# EAGLE board KS-SCH-01467 OSSAT OBC Dev Board PCB (EAGLE 9.7.0), part 1 of 2
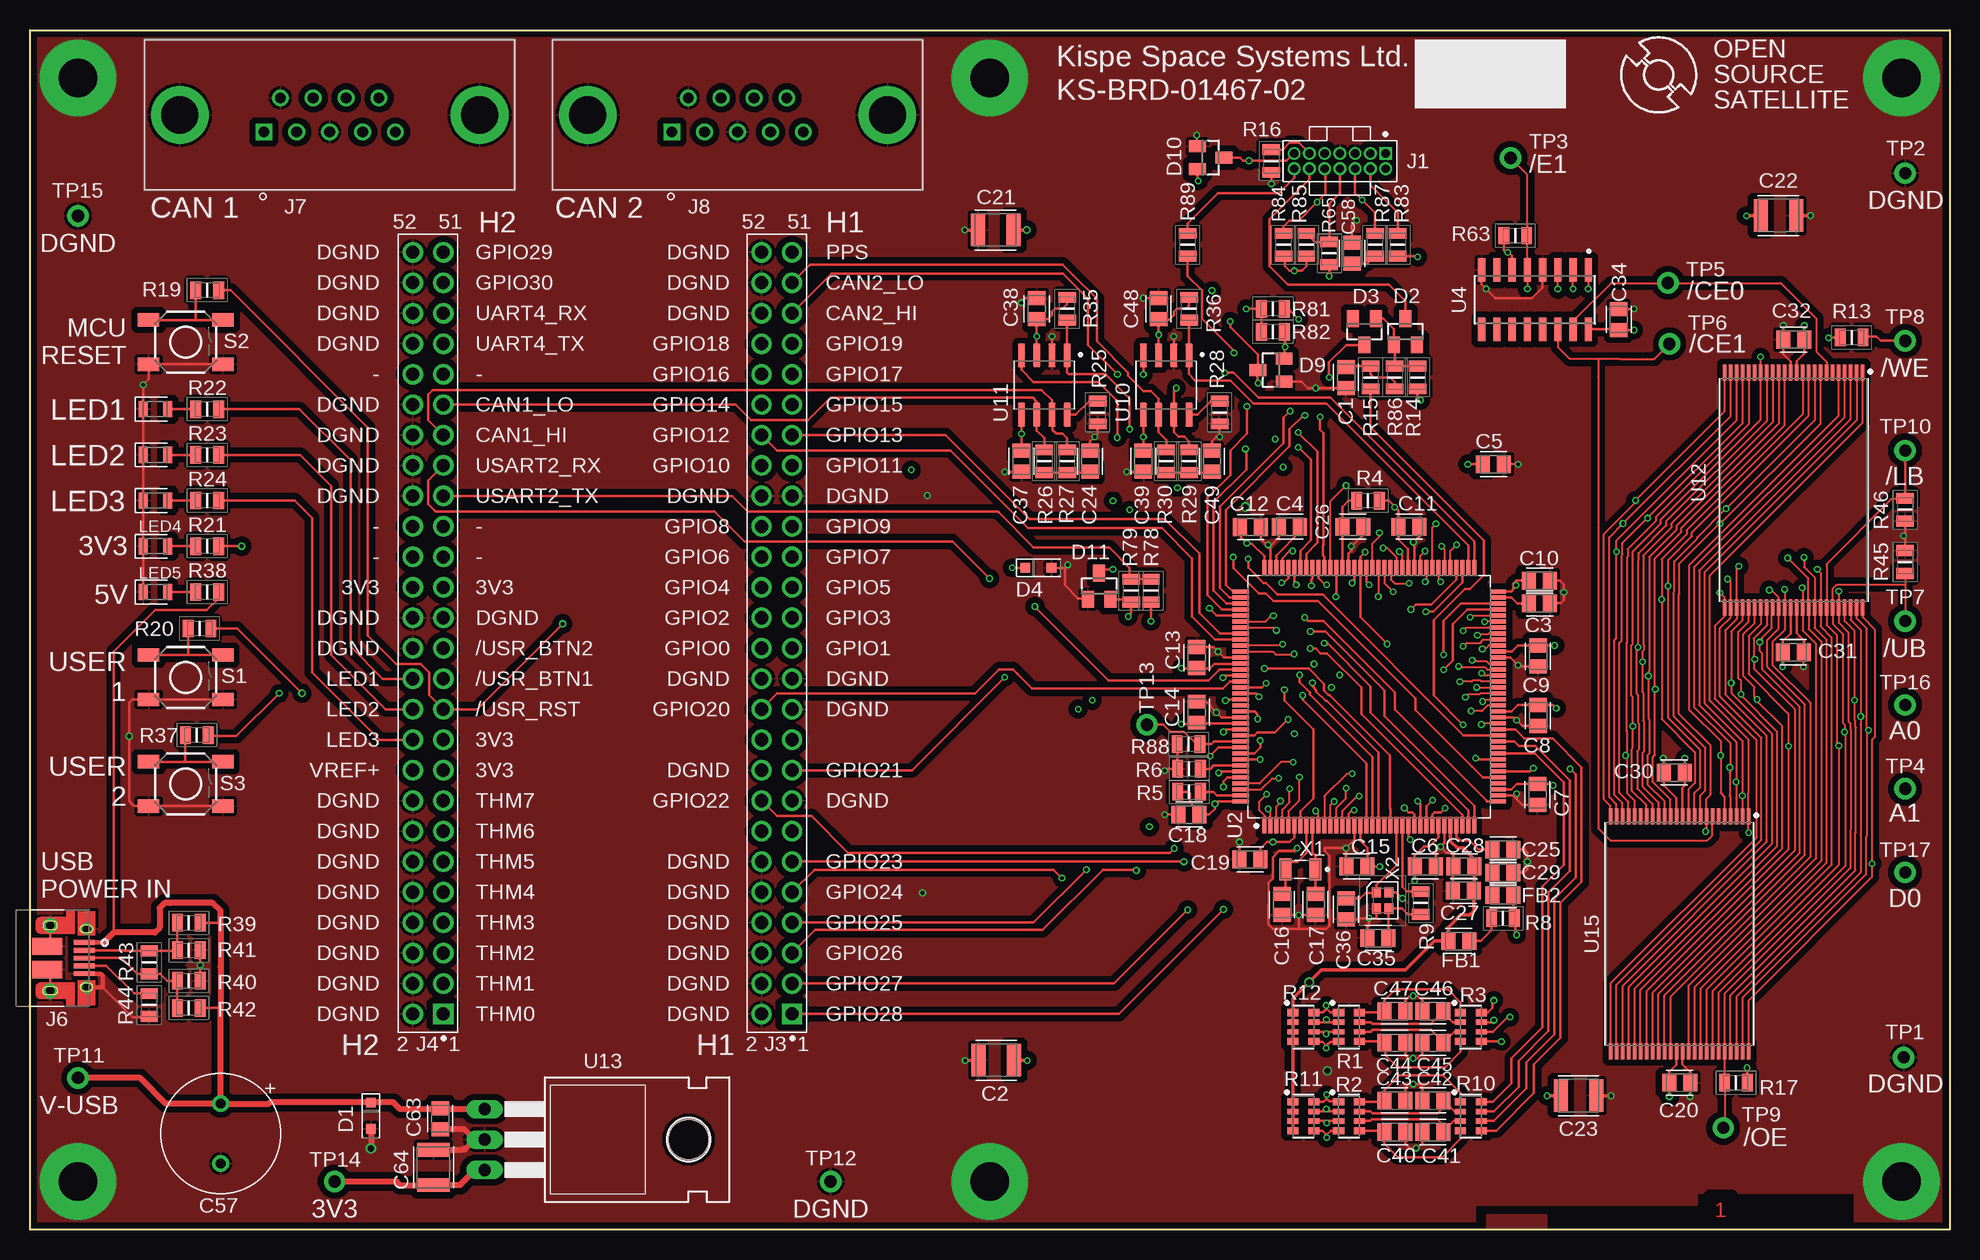
[diagram p0: board, top side]
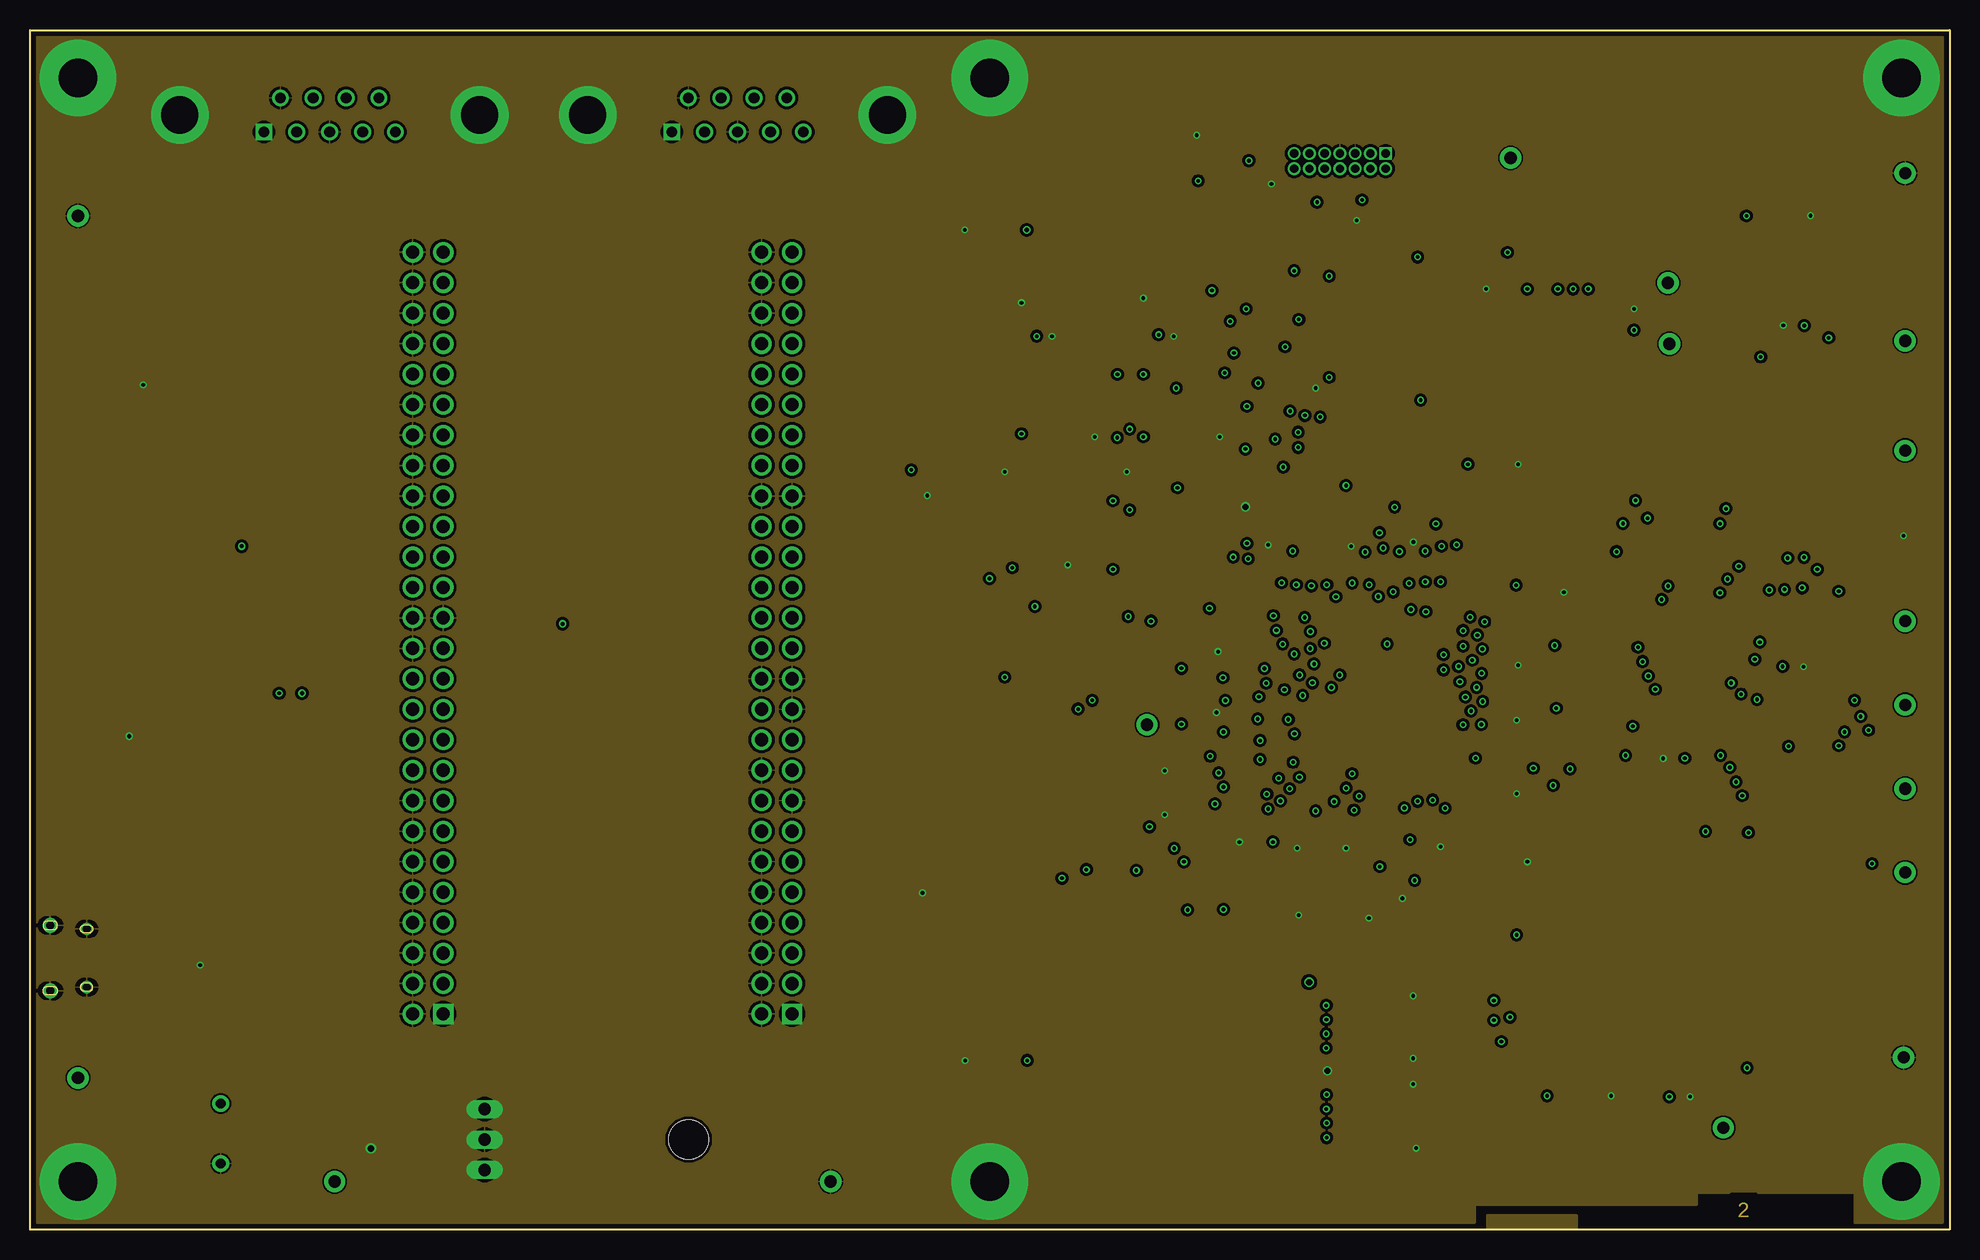
[diagram p1: board, inner layer Route2]
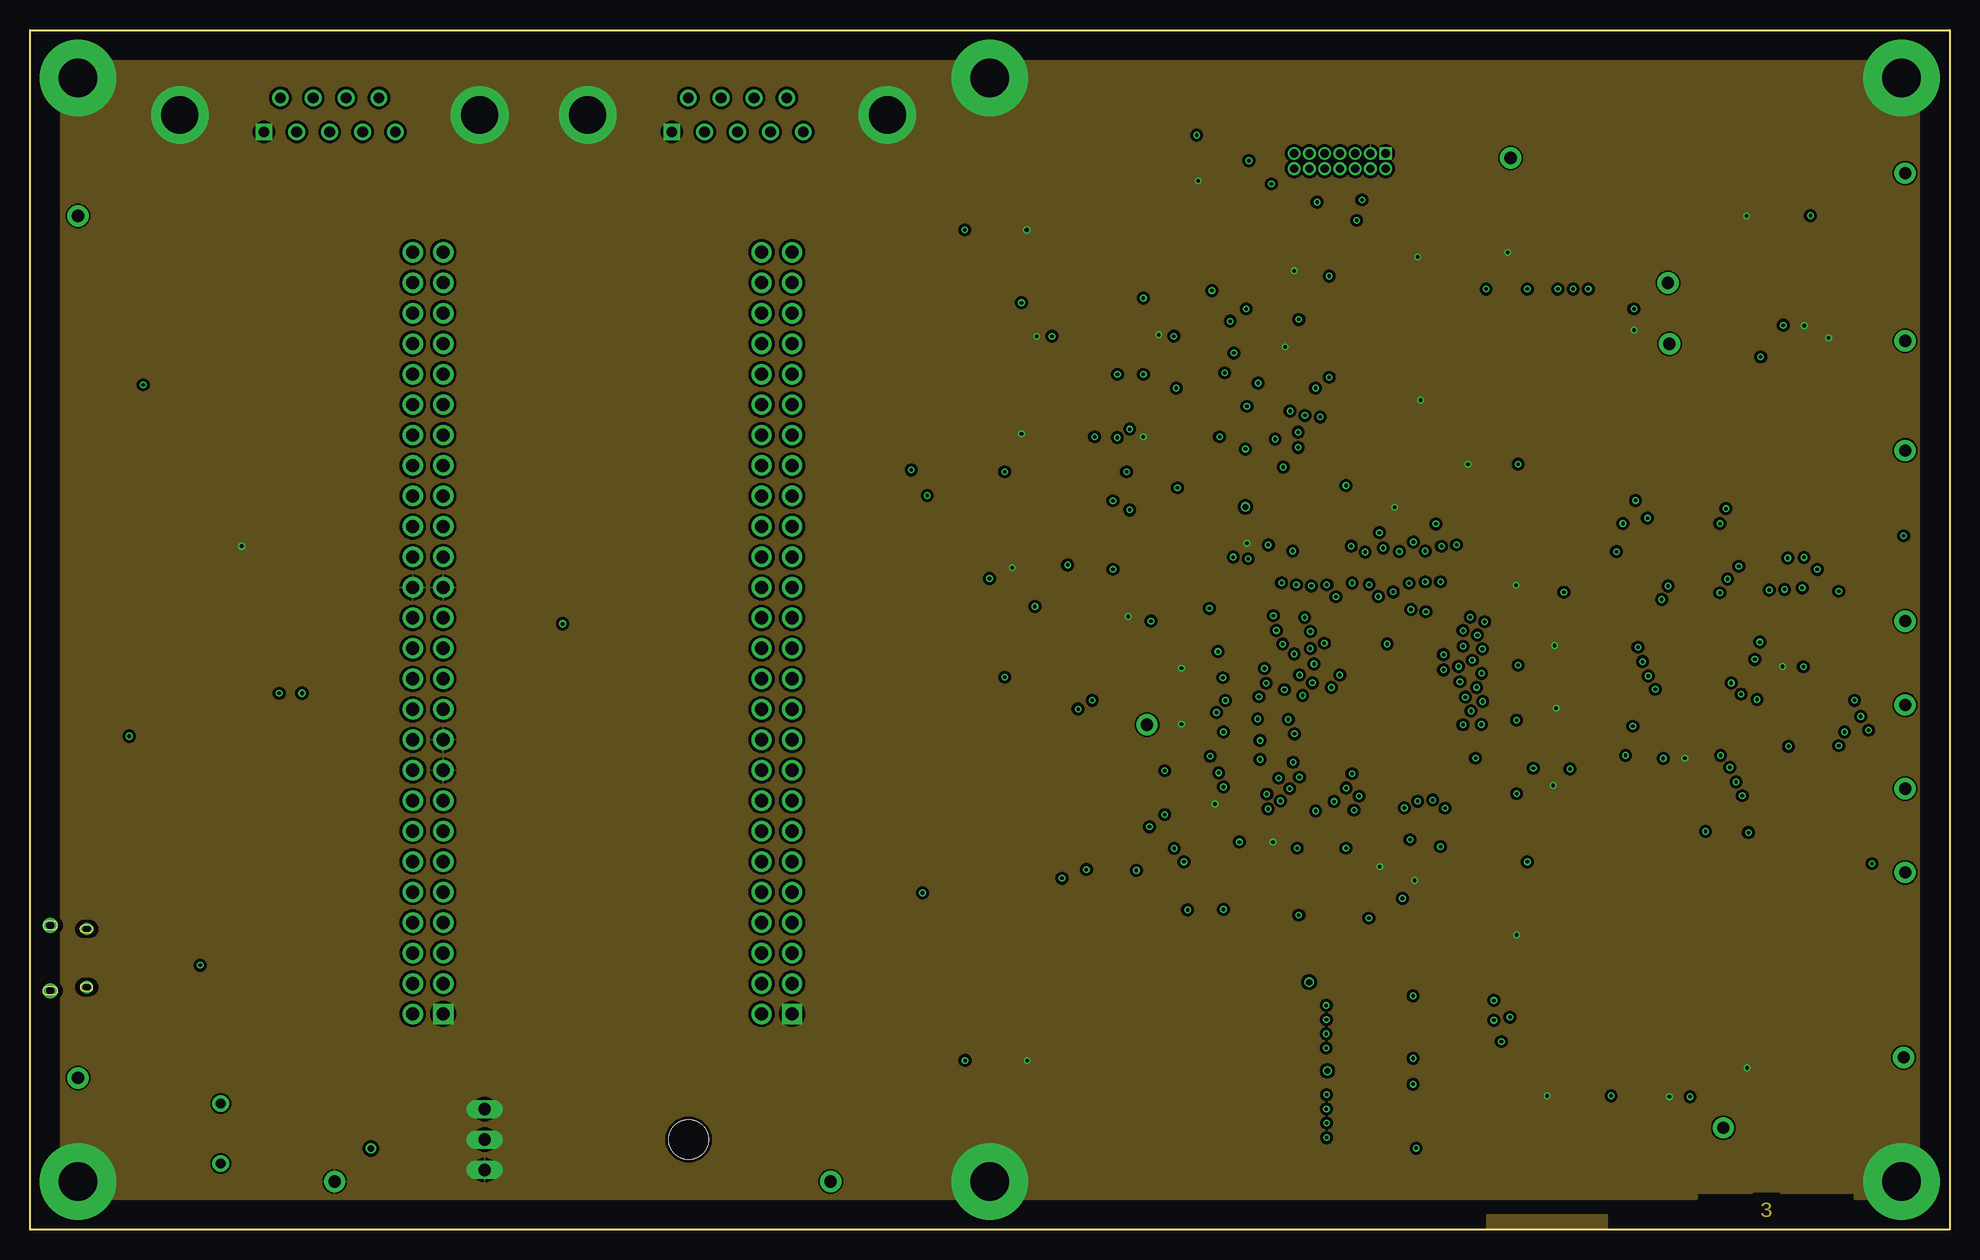
[diagram p2: board, inner layer Route3]
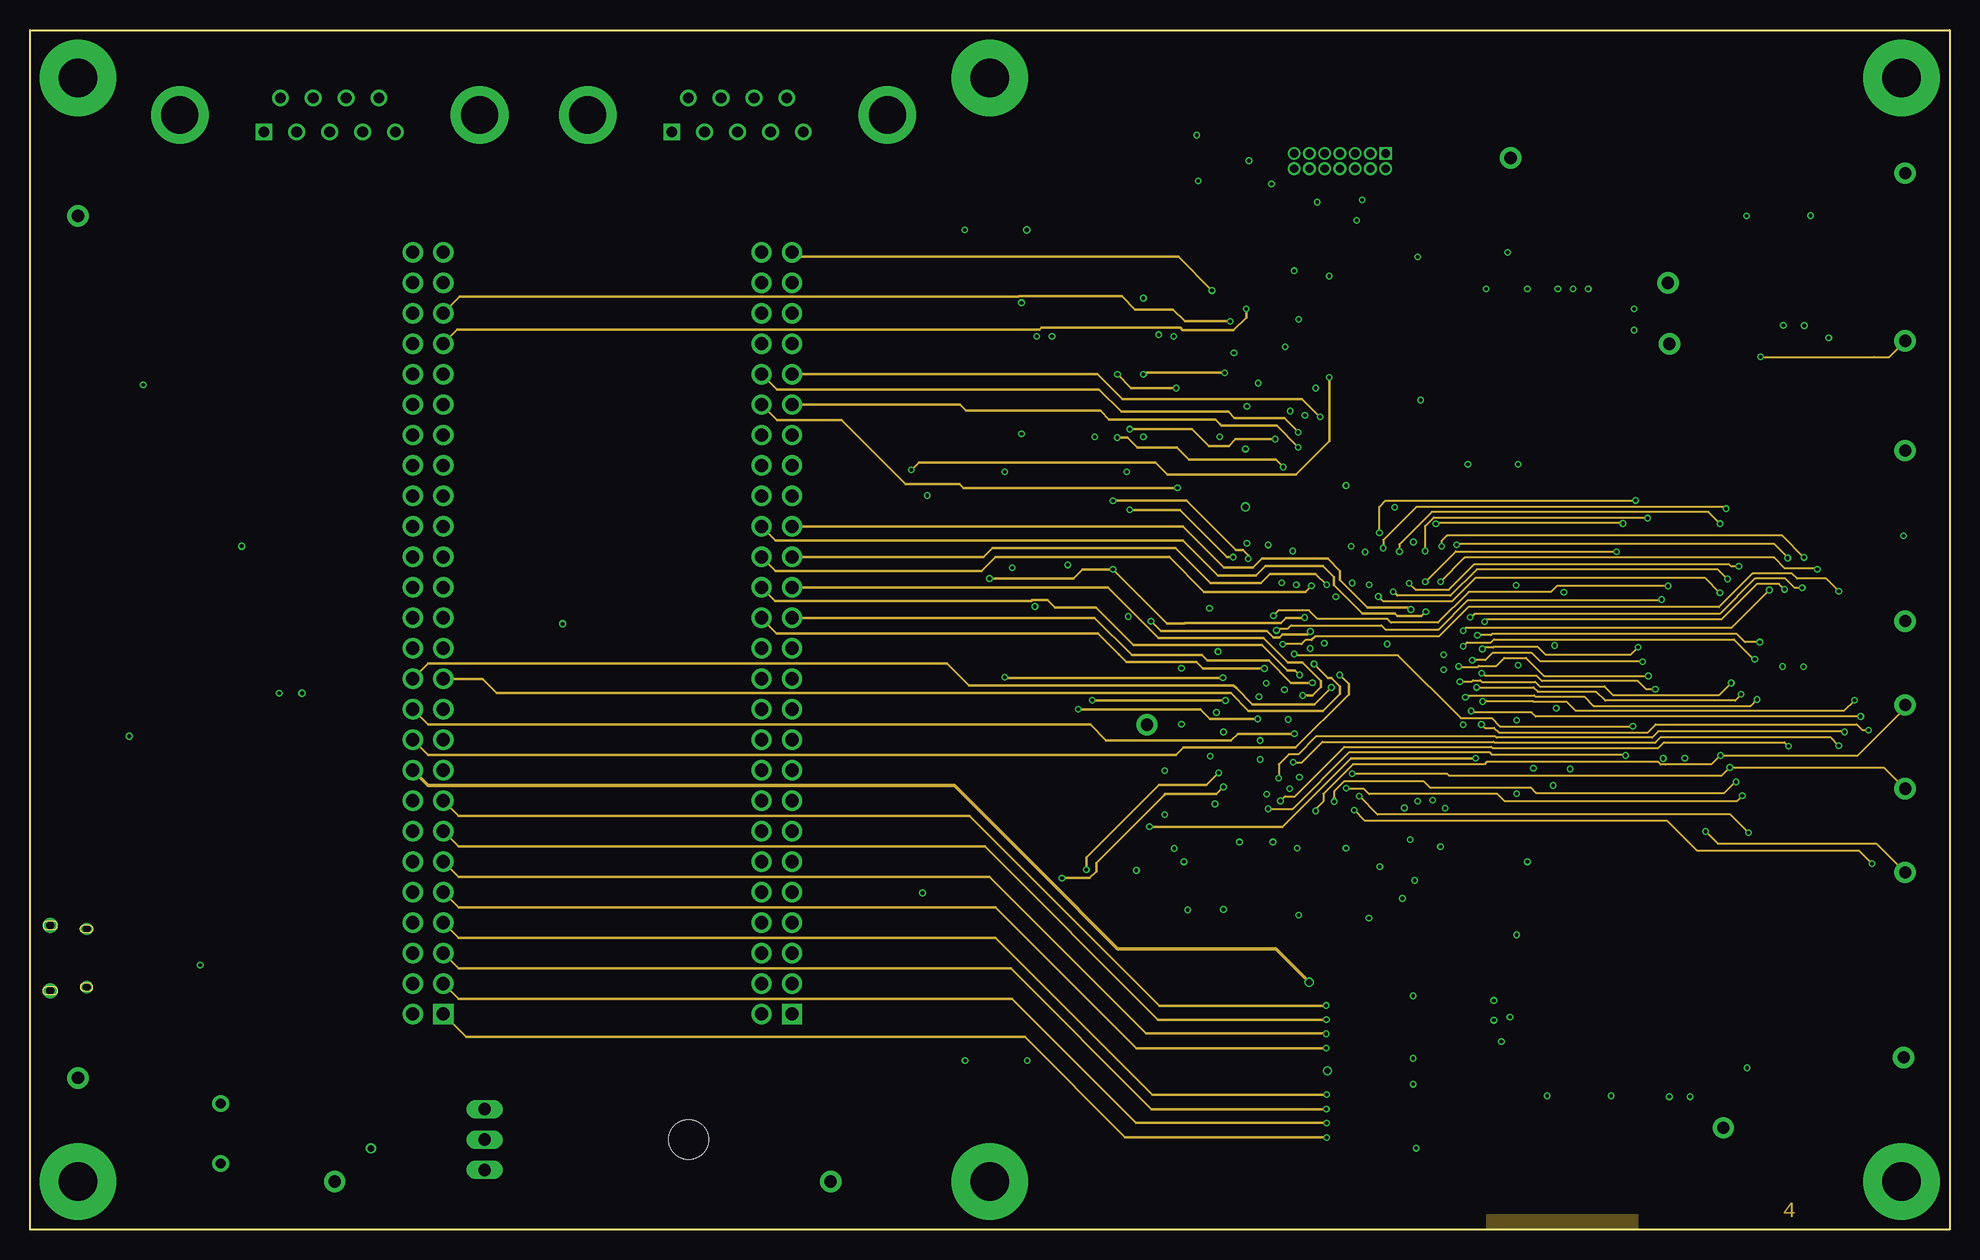
[diagram p3: board, inner layer Route14]
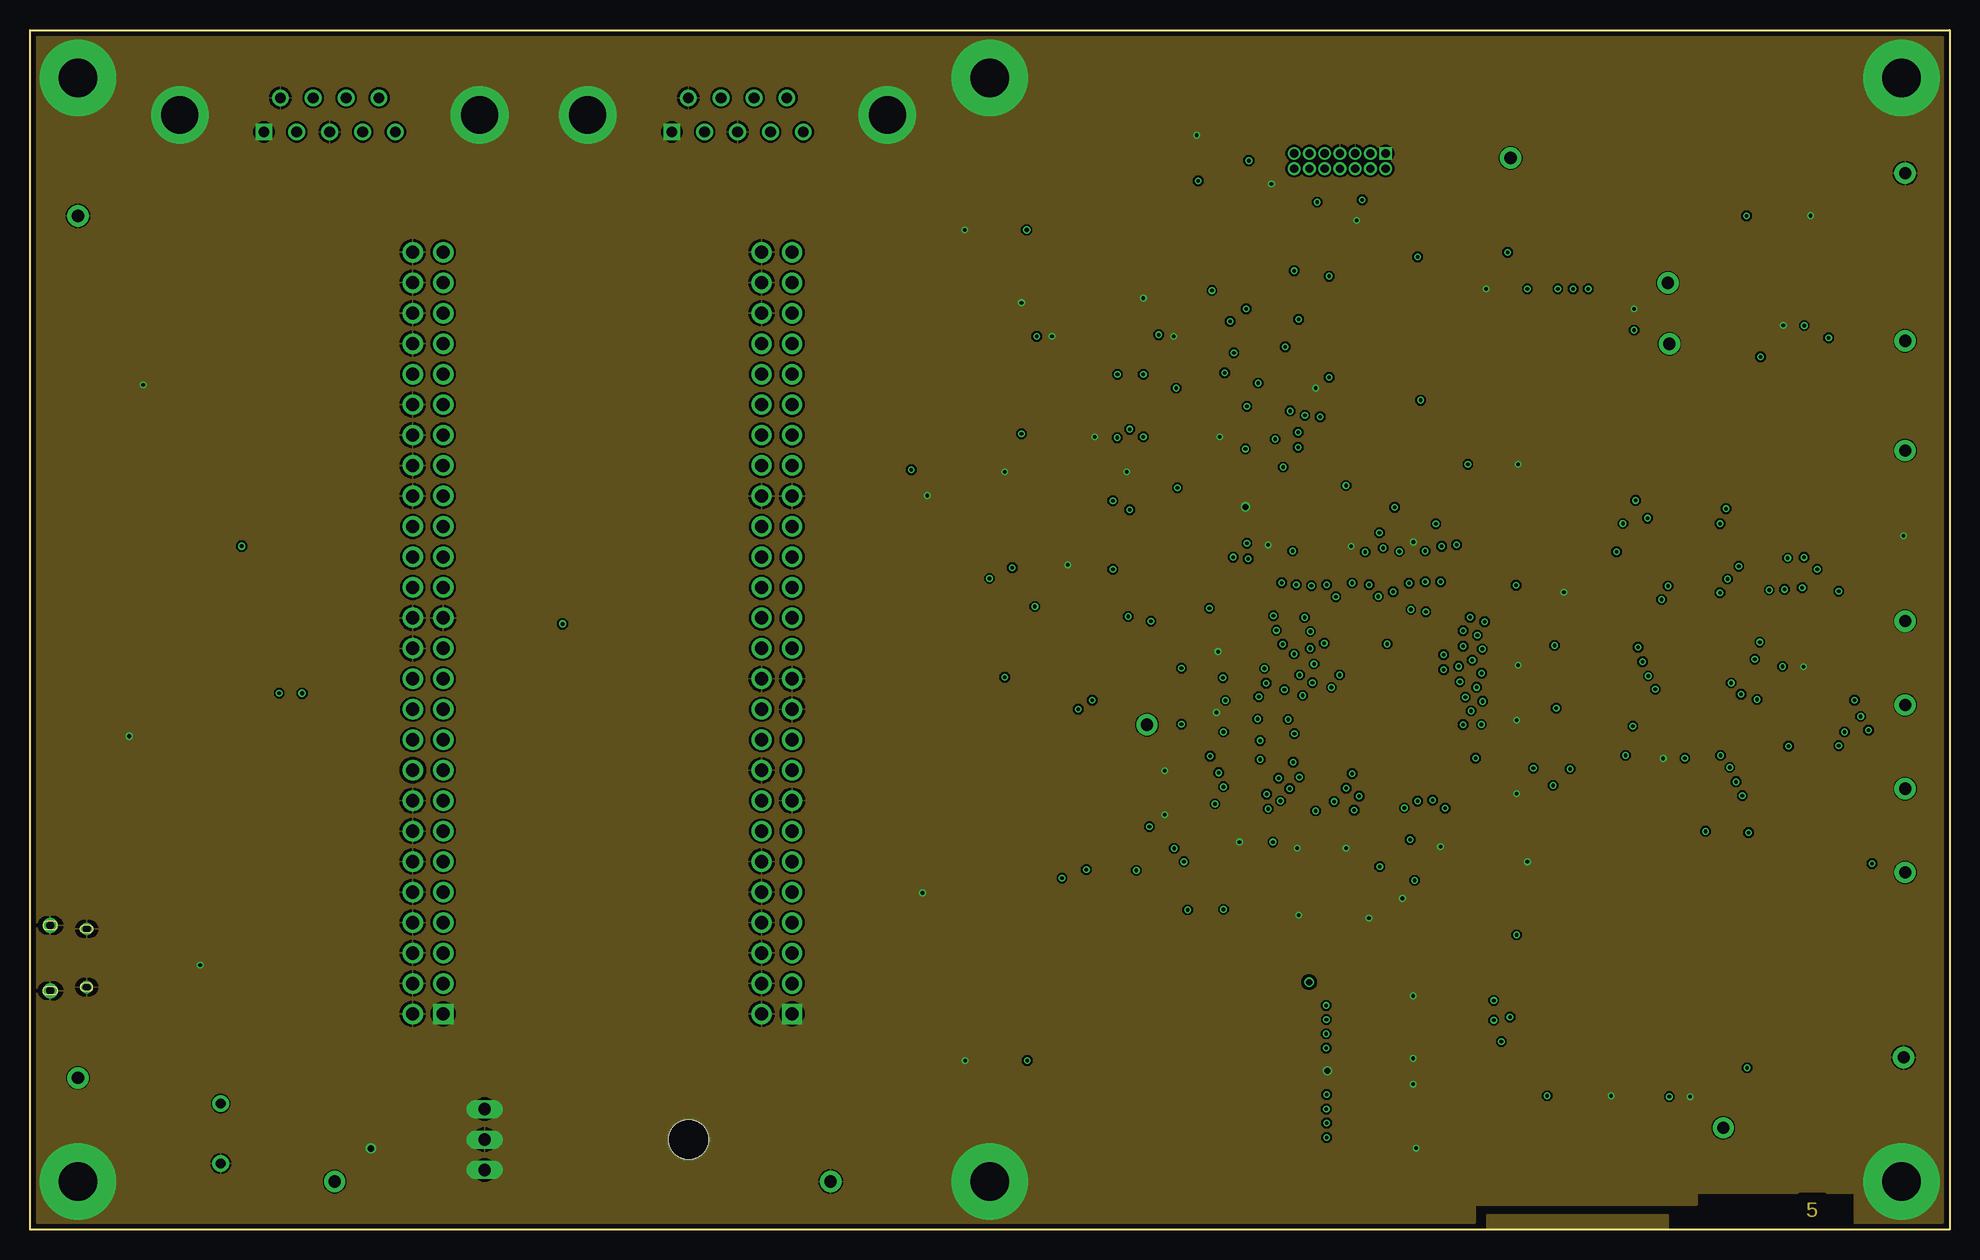
[diagram p4: board, inner layer Route15]
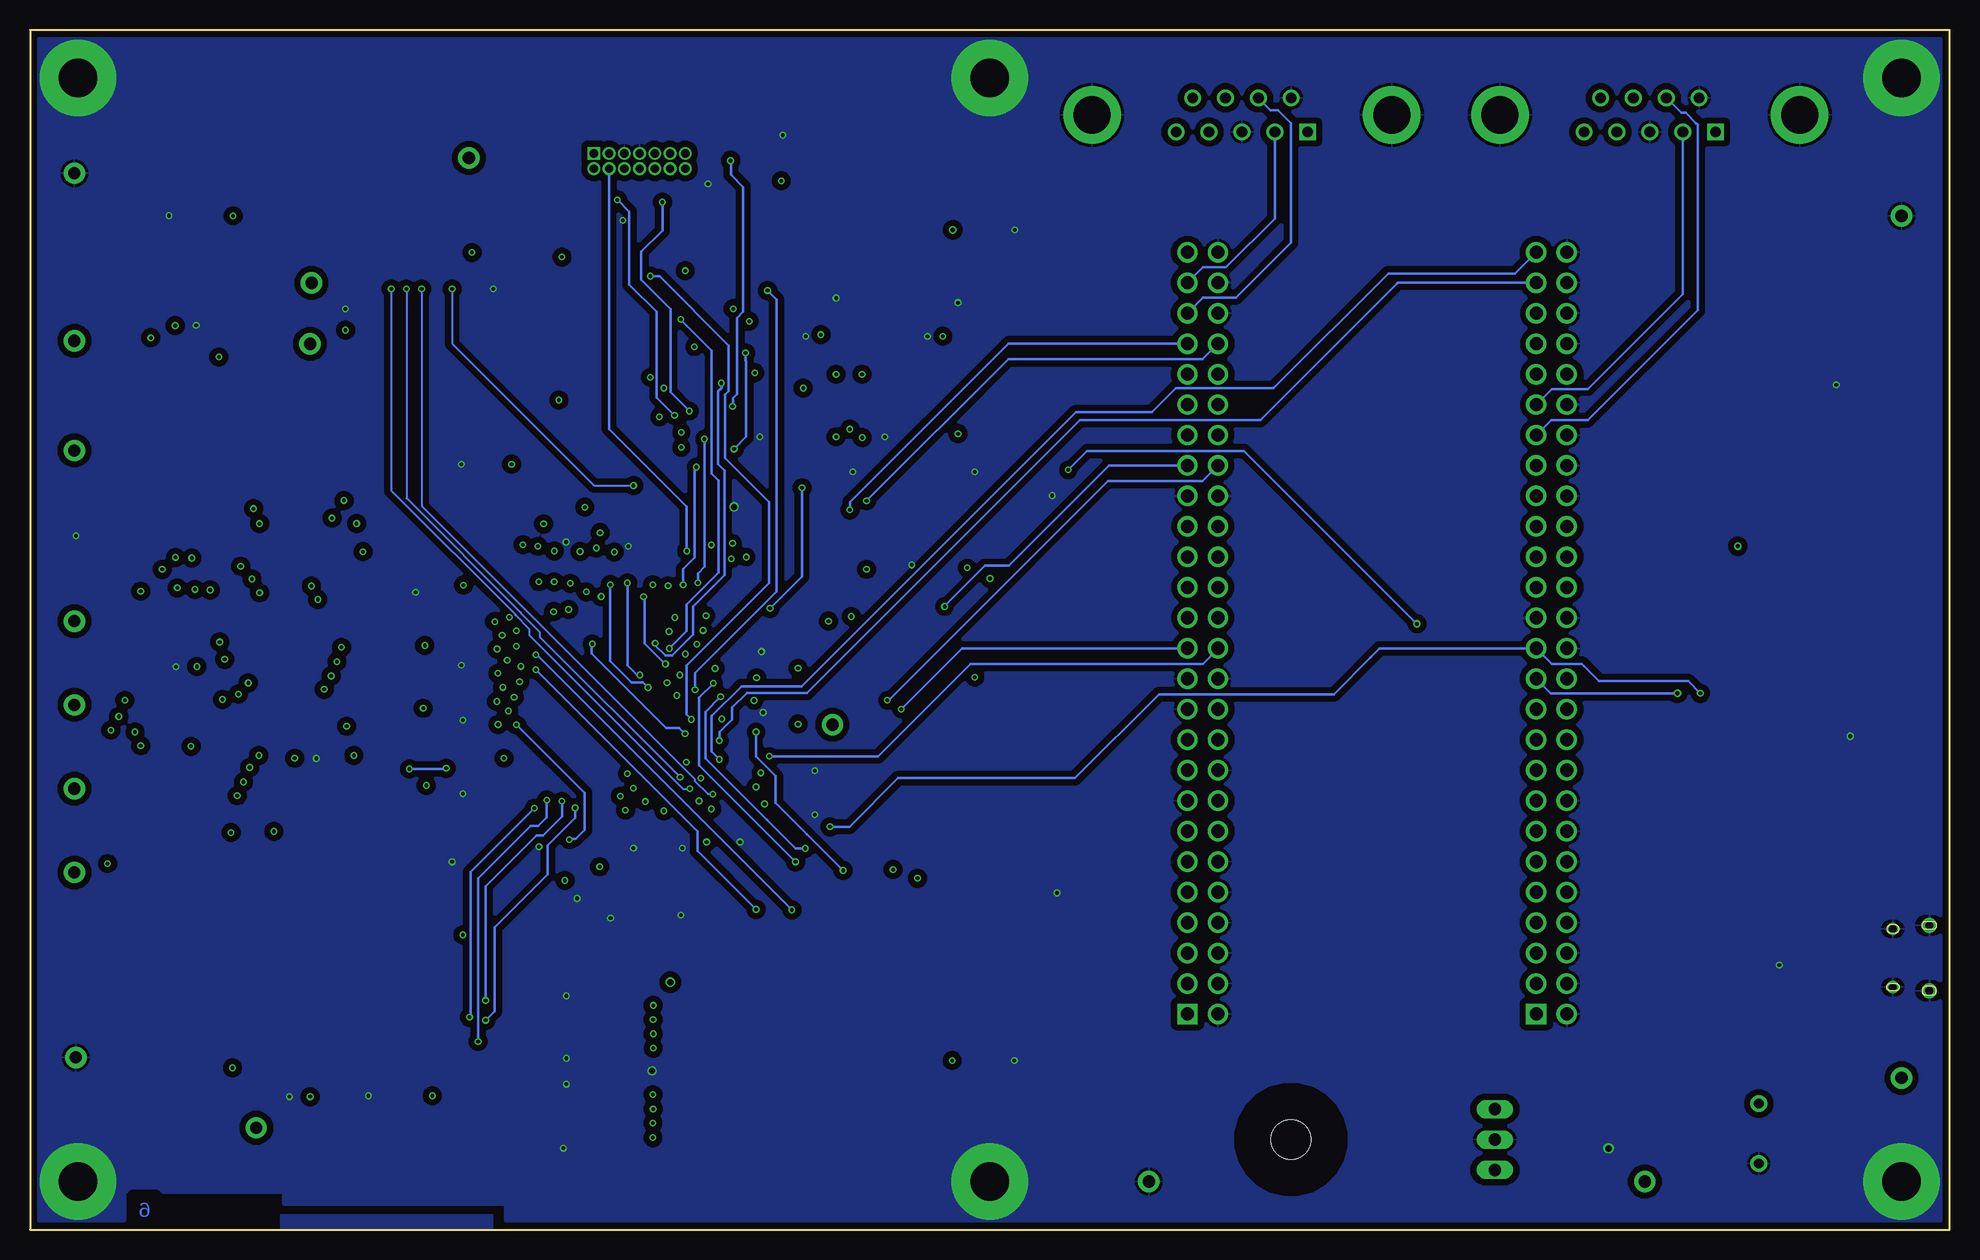
[diagram p5: board, bottom side, seen from below]

Size 160 x 100 mm. Coordinates in mm from the lower left corner, seen from the top.
Outline: 160,0 0,0 0,100 160,100 160,0
Copper layers (1+2*3+14*15+16): Top / Route2 / Route3 / Route14 / Route15 / Bottom
Stack-up 6 Layer Stack: Top SilkScreen Epoxy Ink / Top SolderMask 0.025mm Dk 4.3 / Top Surface Finish User Defined 0.02mm / Top CuFoil:007 0.035mm / Dielectric-1 User Defined 0.11mm / Dielectric-2 User Defined 0.11mm / Route2 CuFoil:007 0.035mm / Dielectric-3 User Defined 0.3mm / Route3 CuFoil:007 0.035mm / Dielectric-4 User Defined 0.11mm / Dielectric-9 User Defined 0.11mm / Dielectric-5 User Defined 0.11mm / Route14 CuFoil:007 0.035mm / Dielectric-6 User Defined 0.3mm / Route15 CuFoil:007 0.035mm / Dielectric-7 User Defined 0.11mm / Dielectric-8 User Defined 0.11mm / Bottom CuFoil:007 0.035mm / Bottom Surface Finish User Defined 0.02mm / Bottom SolderMask 0.025mm Dk 4.3 / Bottom SilkScreen Epoxy Ink
Design rules "default *": minimum track width 6mil, minimum drill 12mil, track to track 11mil, track to pad 8mil, pad to pad 6mil, via to via 6mil, smd to smd 6mil, copper to edge 0mil, drill to drill 36.5mil, minimum pad ring 7mil, minimum via ring 5mil, stop-mask expansion 4mil, vias tented up to drill 30mil, thermal gap 10mil
Net classes: 0 default: width 0.203 mm, drill 0.305 mm; 1 MRAM Bus: width 0.152 mm, drill 0.305 mm; 2 lvds: width 0.381 mm, clearance 0.152 mm to class 0, clearance 0.152 mm to class 1, clearance 0.152 mm; 4 Vref: width 0.305 mm, drill 0.508 mm, clearance 0.279 mm to class 0, clearance 0.279 mm to class 1, clearance 0.279 mm to class 2, clearance 0.279 mm to class 3, clearance 0.279 mm

## Footprints (pad centres in the part's own frame; a part is rotated, then mirrored left to right if it is on the bottom)
CAP_CHIP_0805 = smd 1.165 x 1.465: 1 -0.875,0; 2 0.875,0
CAPC3225X135_1210 = smd 1.165 x 2.715: 1 -1.475,0; 2 1.475,0
CAP_ELECT_RADIAL_D10_H12.5_P5 = drill 0.8 pad 1.4: 1 -2.5,0; 2 2.5,0
SOD323 = smd 0.8 x 0.8: A 1.1,0; C -1.1,0
SOT23 = smd 1 x 1.4: 1 -0.95,-1.1; 2 0.95,-1.1; 3 0,1.1
BEADC2012X105N = smd 1.165 x 1.465: 1 -0.875,0; 2 0.875,0
HOLE-PTH-3.2-6.35 = drill 3.2 pad 6.35: P$1 0,0
HDRV14W41P127_2X7_FTSH = drill 0.686 pad 1.067 square: 1 0,0 | drill 0.686 pad 1.067: 2 0,1.27; 3 1.27,0; 4 1.27,1.27; 5 2.54,0; 6 2.54,1.27; 7 3.81,0; 8 3.81,1.27; 9 5.08,0; 10 5.08,1.27; 11 6.35,0; 12 6.35,1.27; 13 7.62,0; 14 7.62,1.27
HDRVR52W64P254_2X26_6655X495X1105B = drill 1.105 pad 1.705 square: 1 0,0 | drill 1.105 pad 1.705: 2 0,2.54; 3 2.54,0; 4 2.54,2.54; 5 5.08,0; 6 5.08,2.54; 7 7.62,0; 8 7.62,2.54; 9 10.16,0; 10 10.16,2.54; 11 12.7,0; 12 12.7,2.54; 13 15.24,0; 14 15.24,2.54; 15 17.78,0; 16 17.78,2.54; 17 20.32,0; 18 20.32,2.54; 19 22.86,0; 20 22.86,2.54; 21 25.4,0; 22 25.4,2.54; 23 27.94,0; 24 27.94,2.54; 25 30.48,0; 26 30.48,2.54; 27 33.02,0; 28 33.02,2.54; 29 35.56,0; 30 35.56,2.54; 31 38.1,0; 32 38.1,2.54; 33 40.64,0; 34 40.64,2.54; 35 43.18,0; 36 43.18,2.54; 37 45.72,0; 38 45.72,2.54; 39 48.26,0; 40 48.26,2.54; 41 50.8,0; 42 50.8,2.54; 43 53.34,0; 44 53.34,2.54; 45 55.88,0; 46 55.88,2.54; 47 58.42,0; 48 58.42,2.54; 49 60.96,0; 50 60.96,2.54; 51 63.5,0; 52 63.5,2.54
CON_MICRO_USB_FEMALE = smd 0.4 x 1.75: 1 -1.3,2.825; 2 -0.65,2.825; 3 0,2.825; 4 0.65,2.825; 5 1.3,2.825 | drill 0.66 pad 1.016 slot 1.05 rotated 90: 6 -2.425,3.03; 7 2.425,3.03 | drill 0.7 pad 1.27 slot 1.27 rotated 90: 8 2.725,0; 9 -2.725,0 | smd 1.425 x 2.5: 10 -0.963,-0.25; 11 0.963,-0.25
LD09S24A4GV00LF = drill 0.9 pad 1.4 square: 1 0,0 | drill 0.9 pad 1.4: 2 -2.74,0; 3 -5.48,0; 4 -8.22,0; 5 -10.96,0; 6 -1.37,-2.84; 7 -4.11,-2.84; 8 -6.85,-2.84; 9 -9.59,-2.84 | drill 3.1 pad 4.8: MH1 -17.975,-1.42; MH2 7.015,-1.42
LED_CHIP_0805 = smd 0.762 x 1.362: A 1.025,0; C -1.025,0
RESCAXS80P320X160X60-8N = smd 0.931 x 0.592: 1 -0.87,1.2; 4 -0.87,-1.2; 5 0.87,-1.2; 8 0.87,1.2 | smd 0.931 x 0.442: 2 -0.87,0.4; 3 -0.87,-0.4; 6 0.87,-0.4; 7 0.87,0.4
RES_CHIP_0805 = smd 0.9 x 1.45: 1 -0.95,0; 2 0.95,0
TACTILE_SWITCH_SMD_5.2MM = smd 1.8 x 1.1: 1 -3.1,1.85; 2 3.1,1.85; 3 -3.1,-1.85; 4 3.1,-1.85
TP-40TH = drill 1.016 pad 1.778: P$1 0,0
IC_STM32H753ZIT6 = smd 1.35 x 0.348: 1 -10.725,8.75; 2 -10.725,8.25; 3 -10.725,7.75; 4 -10.725,7.25; 5 -10.725,6.75; 6 -10.725,6.25; 7 -10.725,5.75; 8 -10.725,5.25; 9 -10.725,4.75; 10 -10.725,4.25; 11 -10.725,3.75; 12 -10.725,3.25; 13 -10.725,2.75; 14 -10.725,2.25; 15 -10.725,1.75; 16 -10.725,1.25; 17 -10.725,0.75; 18 -10.725,0.25; 19 -10.725,-0.25; 20 -10.725,-0.75; 21 -10.725,-1.25; 22 -10.725,-1.75; 23 -10.725,-2.25; 24 -10.725,-2.75; 25 -10.725,-3.25; 26 -10.725,-3.75; 27 -10.725,-4.25; 28 -10.725,-4.75; 29 -10.725,-5.25; 30 -10.725,-5.75; 31 -10.725,-6.25; 32 -10.725,-6.75; 33 -10.725,-7.25; 34 -10.725,-7.75; 35 -10.725,-8.25; 36 -10.725,-8.75; 73 10.725,-8.75; 74 10.725,-8.25; 75 10.725,-7.75; 76 10.725,-7.25; 77 10.725,-6.75; 78 10.725,-6.25; 79 10.725,-5.75; 80 10.725,-5.25; 81 10.725,-4.75; 82 10.725,-4.25; 83 10.725,-3.75; 84 10.725,-3.25; 85 10.725,-2.75; 86 10.725,-2.25; 87 10.725,-1.75; 88 10.725,-1.25; 89 10.725,-0.75; 90 10.725,-0.25; 91 10.725,0.25; 92 10.725,0.75; 93 10.725,1.25; 94 10.725,1.75; 95 10.725,2.25; 96 10.725,2.75; 97 10.725,3.25; 98 10.725,3.75; 99 10.725,4.25; 100 10.725,4.75; 101 10.725,5.25; 102 10.725,5.75; 103 10.725,6.25; 104 10.725,6.75; 105 10.725,7.25; 106 10.725,7.75; 107 10.725,8.25; 108 10.725,8.75 | smd 0.348 x 1.35: 37 -8.75,-10.725; 38 -8.25,-10.725; 39 -7.75,-10.725; 40 -7.25,-10.725; 41 -6.75,-10.725; 42 -6.25,-10.725; 43 -5.75,-10.725; 44 -5.25,-10.725; 45 -4.75,-10.725; 46 -4.25,-10.725; 47 -3.75,-10.725; 48 -3.25,-10.725; 49 -2.75,-10.725; 50 -2.25,-10.725; 51 -1.75,-10.725; 52 -1.25,-10.725; 53 -0.75,-10.725; 54 -0.25,-10.725; 55 0.25,-10.725; 56 0.75,-10.725; 57 1.25,-10.725; 58 1.75,-10.725; 59 2.25,-10.725; 60 2.75,-10.725; 61 3.25,-10.725; 62 3.75,-10.725; 63 4.25,-10.725; 64 4.75,-10.725; 65 5.25,-10.725; 66 5.75,-10.725; 67 6.25,-10.725; 68 6.75,-10.725; 69 7.25,-10.725; 70 7.75,-10.725; 71 8.25,-10.725; 72 8.75,-10.725; 109 8.75,10.725; 110 8.25,10.725; 111 7.75,10.725; 112 7.25,10.725; 113 6.75,10.725; 114 6.25,10.725; 115 5.75,10.725; 116 5.25,10.725; 117 4.75,10.725; 118 4.25,10.725; 119 3.75,10.725; 120 3.25,10.725; 121 2.75,10.725; 122 2.25,10.725; 123 1.75,10.725; 124 1.25,10.725; 125 0.75,10.725; 126 0.25,10.725; 127 -0.25,10.725; 128 -0.75,10.725; 129 -1.25,10.725; 130 -1.75,10.725; 131 -2.25,10.725; 132 -2.75,10.725; 133 -3.25,10.725; 134 -3.75,10.725; 135 -4.25,10.725; 136 -4.75,10.725; 137 -5.25,10.725; 138 -5.75,10.725; 139 -6.25,10.725; 140 -6.75,10.725; 141 -7.25,10.725; 142 -7.75,10.725; 143 -8.25,10.725; 144 -8.75,10.725
SOIC-16 = smd 1.97 x 0.6: 1 -2.475,4.445; 2 -2.475,3.175; 3 -2.475,1.905; 4 -2.475,0.635; 5 -2.475,-0.635; 6 -2.475,-1.905; 7 -2.475,-3.175; 8 -2.475,-4.445; 9 2.475,-4.445; 10 2.475,-3.175; 11 2.475,-1.905; 12 2.475,-0.635; 13 2.475,0.635; 14 2.475,1.905; 15 2.475,3.175; 16 2.475,4.445
IC_MAX33054EASA+ = smd 1.97 x 0.59: 1 -2.475,1.905; 2 -2.475,0.635; 3 -2.475,-0.635; 4 -2.475,-1.905; 5 2.475,-1.905; 6 2.475,-0.635; 7 2.475,0.635; 8 2.475,1.905
IS61WV204816BLL-10TLI = smd 1.338 x 0.284: 1 -9.79,5.75; 2 -9.79,5.25; 3 -9.79,4.75; 4 -9.79,4.25; 5 -9.79,3.75; 6 -9.79,3.25; 7 -9.79,2.75; 8 -9.79,2.25; 9 -9.79,1.75; 10 -9.79,1.25; 11 -9.79,0.75; 12 -9.79,0.25; 13 -9.79,-0.25; 14 -9.79,-0.75; 15 -9.79,-1.25; 16 -9.79,-1.75; 17 -9.79,-2.25; 18 -9.79,-2.75; 19 -9.79,-3.25; 20 -9.79,-3.75; 21 -9.79,-4.25; 22 -9.79,-4.75; 23 -9.79,-5.25; 24 -9.79,-5.75; 25 9.79,-5.75; 26 9.79,-5.25; 27 9.79,-4.75; 28 9.79,-4.25; 29 9.79,-3.75; 30 9.79,-3.25; 31 9.79,-2.75; 32 9.79,-2.25; 33 9.79,-1.75; 34 9.79,-1.25; 35 9.79,-0.75; 36 9.79,-0.25; 37 9.79,0.25; 38 9.79,0.75; 39 9.79,1.25; 40 9.79,1.75; 41 9.79,2.25; 42 9.79,2.75; 43 9.79,3.25; 44 9.79,3.75; 45 9.79,4.25; 46 9.79,4.75; 47 9.79,5.25; 48 9.79,5.75
TO220L1A = drill 1.016 long: 1 -2.54,0; 2 0,0; 3 2.54,0 | hole 3.302: 0,17
XTAL_NX3215SA = smd 1 x 1.8: 1 -1.25,0; 2 1.25,0
XTAL_NX2016SA = smd 0.85 x 0.75: 1 -0.675,-0.525; 2 0.675,-0.525; 3 0.675,0.525; 4 -0.675,0.525

## Placement (x,y rotation side)
C1  100nF  [CAP_CHIP_0805]  109.7,71.04 270 top
C2  47uF  [CAPC3225X135_1210]  80.54,14.12 180 top
C3  2u2  [CAP_CHIP_0805]  125.83,52.19 0 top
C4  2u2  [CAP_CHIP_0805]  105,58.59 180 top
C5  4u7  [CAP_CHIP_0805]  121.99,63.8 0 top
C6  100nF  [CAP_CHIP_0805]  116.3,30.27 0 top
C7  100nF  [CAP_CHIP_0805]  125.66,36.26 270 top
C8  100nF  [CAP_CHIP_0805]  125.7,42.85 270 top
C9  100nF  [CAP_CHIP_0805]  125.7,47.8 270 top
C10  100nF  [CAP_CHIP_0805]  125.83,54.1 0 top
C11  100nF  [CAP_CHIP_0805]  114.95,58.59 0 top
C12  100nF  [CAP_CHIP_0805]  101.74,58.56 0 top
C13  100nF  [CAP_CHIP_0805]  97.25,47.67 90 top
C14  100nF  [CAP_CHIP_0805]  97.25,43.13 90 top
C15  100nF  [CAP_CHIP_0805]  110.59,30.27 180 top
C16  NF  [CAP_CHIP_0805]  104.36,27.1 270 top
C17  NF  [CAP_CHIP_0805]  107.16,27.1 270 top
C18  100nF  [CAP_CHIP_0805]  96.61,34.59 180 top
C19  100nF  [CAP_CHIP_0805]  101.69,30.85 180 top
C20  100nF  [CAP_CHIP_0805]  137.5,12.24 0 top
C21  47uF  [CAPC3225X135_1210]  80.49,83.32 180 top
C22  47uF  [CAPC3225X135_1210]  145.74,84.53 0 top
C23  47uF  [CAPC3225X135_1210]  129.09,11.16 0 top
C24  47nF  [CAP_CHIP_0805]  88.36,64.06 270 top
C25  100nF  [CAP_CHIP_0805]  122.78,31.67 0 top
C26  100nF  [CAP_CHIP_0805]  110.25,58.59 0 top
C27  1uF  [CAP_CHIP_0805]  119.47,28.24 180 top
C28  100nF  [CAP_CHIP_0805]  119.53,30.27 180 top
C29  1uF  [CAP_CHIP_0805]  122.78,29.77 0 top
C30  1uF  [CAP_CHIP_0805]  137.05,38.1 180 top
C31  100nF  [CAP_CHIP_0805]  146.98,48.13 0 top
C32  1uF  [CAP_CHIP_0805]  147.01,74.19 180 top
C34  100nF  [CAP_CHIP_0805]  132.43,75.87 90 top
C35  10pF  [CAP_CHIP_0805]  112.36,24.3 180 top
C36  10pF  [CAP_CHIP_0805]  109.7,26.72 270 top
C37  100nF  [CAP_CHIP_0805]  82.64,64.06 90 top
C38  100nF  [CAP_CHIP_0805]  83.91,76.75 270 top
C39  100nF  [CAP_CHIP_0805]  92.81,64.06 90 top
C40  1uF  [CAP_CHIP_0805]  113.76,8.12 0 top
C41  1uF  [CAP_CHIP_0805]  116.94,8.12 180 top
C42  1uF  [CAP_CHIP_0805]  116.94,10.77 180 top
C43  1uF  [CAP_CHIP_0805]  113.76,10.77 0 top
C44  1uF  [CAP_CHIP_0805]  113.76,15.57 180 top
C45  1uF  [CAP_CHIP_0805]  116.94,15.57 0 top
C46  1uF  [CAP_CHIP_0805]  116.94,18.21 0 top
C47  1uF  [CAP_CHIP_0805]  113.76,18.21 180 top
C48  100nF  [CAP_CHIP_0805]  94.08,76.75 270 top
C49  47nF  [CAP_CHIP_0805]  98.52,64.06 270 top
C57  470uF  [CAP_ELECT_RADIAL_D10_H12.5_P5]  15.9,8 270 top
C58  100pF  [CAP_CHIP_0805]  110.2,81.38 90 top
C63  100nF  [CAP_CHIP_0805]  34.2,9.25 270 top
C64  10uF  [CAPC3225X135_1210]  33.63,5.18 90 top
D1  5V0  [SOD323]  28.43,9.49 270 top
D2  [SOT23]  114.65,74.85 0 top
D3  [SOT23]  111.22,74.85 180 top
D4  3V3  [SOD323]  84.04,55.16 0 top
D9  [SOT23]  103.44,71.65 90 top
D10  [SOT23]  98.41,89.35 270 top
D11  [SOT23]  89.12,53.64 0 top
FB1  600R  [BEADC2012X105N]  119.09,24.05 0 top
FB2  600R  [BEADC2012X105N]  122.78,27.86 0 top
H1  NF  [HOLE-PTH-3.2-6.35]  80,4 0 top
H2  NF  [HOLE-PTH-3.2-6.35]  156,96 0 top
H3  NF  [HOLE-PTH-3.2-6.35]  156,4 0 top
H4  NF  [HOLE-PTH-3.2-6.35]  80,96 0 top
H5  NF  [HOLE-PTH-3.2-6.35]  4,4 0 top
H6  NF  [HOLE-PTH-3.2-6.35]  4,96 0 top
J1  14M  [HDRV14W41P127_2X7_FTSH]  113,89.71 180 top
J3  52F  [HDRVR52W64P254_2X26_6655X495X1105B]  63.52,17.97 90 top
J4  52F  [HDRVR52W64P254_2X26_6655X495X1105B]  34.44,17.97 90 top
J6  [CON_MICRO_USB_FEMALE]  1.69,22.63 270 top
J7  9F  [LD09S24A4GV00LF]  19.5,91.5 180 top
J8  9F  [LD09S24A4GV00LF]  53.5,91.5 180 top
LED1  [LED_CHIP_0805]  10.45,68.39 0 top
LED2  [LED_CHIP_0805]  10.45,64.58 0 top
LED3  [LED_CHIP_0805]  10.45,60.77 0 top
LED4  [LED_CHIP_0805]  10.45,56.96 0 top
LED5  [LED_CHIP_0805]  10.45,53.15 0 top
R1  10K  [RESCAXS80P320X160X60-8N]  109.95,16.89 0 top
R2  10K  [RESCAXS80P320X160X60-8N]  109.95,9.45 0 top
R3  1K  [RESCAXS80P320X160X60-8N]  120.11,16.89 0 top
R4  0R  [RES_CHIP_0805]  111.54,60.75 0 top
R5  4K7  [RES_CHIP_0805]  96.61,36.5 0 top
R6  4K7  [RES_CHIP_0805]  96.61,38.4 0 top
R8  0R  [RES_CHIP_0805]  122.78,25.95 0 top
R9  0R  [RES_CHIP_0805]  115.92,27.23 270 top
R10  1K  [RESCAXS80P320X160X60-8N]  120.11,9.45 0 top
R11  10K  [RESCAXS80P320X160X60-8N]  106.14,9.45 0 top
R12  10K  [RESCAXS80P320X160X60-8N]  106.14,16.89 0 top
R13  47K  [RES_CHIP_0805]  151.83,74.37 180 top
R14  4K7  [RES_CHIP_0805]  115.66,71.04 90 top
R15  100R  [RES_CHIP_0805]  111.74,71.04 270 top
R16  100R  [RES_CHIP_0805]  103.47,89.07 90 top
R17  47K  [RES_CHIP_0805]  142.21,12.24 0 top
R19  100R  [RES_CHIP_0805]  14.77,78.3 0 top
R20  100R  [RES_CHIP_0805]  14.13,50.1 0 top
R21  910R  [RES_CHIP_0805]  14.77,56.96 180 top
R22  910R  [RES_CHIP_0805]  14.77,68.39 180 top
R23  910R  [RES_CHIP_0805]  14.77,64.58 180 top
R24  910R  [RES_CHIP_0805]  14.77,60.77 180 top
R25  0R  [RES_CHIP_0805]  89,68.12 90 top
R26  60R4  [RES_CHIP_0805]  84.55,64.06 270 top
R27  60R4  [RES_CHIP_0805]  86.45,64.06 270 top
R28  0R  [RES_CHIP_0805]  99.16,68.12 90 top
R29  60R4  [RES_CHIP_0805]  96.61,64.06 270 top
R30  60R4  [RES_CHIP_0805]  94.71,64.06 270 top
R35  47K  [RES_CHIP_0805]  86.45,76.75 90 top
R36  47K  [RES_CHIP_0805]  96.61,76.75 90 top
R37  100R  [RES_CHIP_0805]  13.9,41.21 0 top
R38  2K  [RES_CHIP_0805]  14.77,53.15 180 top
R39  NF  [RES_CHIP_0805]  13.24,25.58 0 top
R40  NF  [RES_CHIP_0805]  13.24,20.75 180 top
R41  NF  [RES_CHIP_0805]  13.24,23.29 180 top
R42  NF  [RES_CHIP_0805]  13.24,18.46 0 top
R43  200R  [RES_CHIP_0805]  9.93,22.27 90 top
R44  NF  [RES_CHIP_0805]  9.93,18.72 90 top
R45  NF  [RES_CHIP_0805]  156.31,55.65 90 top
R46  NF  [RES_CHIP_0805]  156.31,60.02 270 top
R63  47K  [RES_CHIP_0805]  123.79,82.85 180 top
R65  33R  [RES_CHIP_0805]  108.3,81.38 270 top
R78  33R  [RES_CHIP_0805]  93.44,53.26 270 top
R79  47K  [RES_CHIP_0805]  91.79,53.26 270 top
R81  33R  [RES_CHIP_0805]  103.6,76.75 0 top
R82  47K  [RES_CHIP_0805]  103.6,74.85 0 top
R83  10K  [RES_CHIP_0805]  114.01,82.09 270 top
R84  10K  [RES_CHIP_0805]  104.49,82.09 270 top
R85  10K  [RES_CHIP_0805]  106.39,82.09 270 top
R86  1K  [RES_CHIP_0805]  113.76,71.04 90 top
R87  68R  [RES_CHIP_0805]  112.11,82.09 270 top
R88  NF  [RES_CHIP_0805]  96.57,40.46 0 top
R89  33R  [RES_CHIP_0805]  96.49,82.09 270 top
S1  [TACTILE_SWITCH_SMD_5.2MM]  12.99,46.04 0 top
S2  [TACTILE_SWITCH_SMD_5.2MM]  12.99,73.98 0 top
S3  [TACTILE_SWITCH_SMD_5.2MM]  12.99,37.15 0 top
TP1  NF  [TP-40TH]  156.18,14.35 0 top
TP2  NF  [TP-40TH]  156.31,88.06 0 top
TP3  NF  [TP-40TH]  123.41,89.33 0 top
TP4  NF  [TP-40TH]  156.31,36.75 0 top
TP5  NF  [TP-40TH]  136.53,78.91 180 top
TP6  NF  [TP-40TH]  136.66,73.83 0 top
TP7  NF  [TP-40TH]  156.31,50.72 0 top
TP8  NF  [TP-40TH]  156.31,74.09 90 top
TP9  NF  [TP-40TH]  141.14,8.48 90 top
TP10  NF  [TP-40TH]  156.31,64.94 0 top
TP11  NF  [TP-40TH]  4,12.64 0 top
TP12  NF  [TP-40TH]  66.74,4 0 top
TP13  NF  [TP-40TH]  93.11,42.08 0 top
TP14  NF  [TP-40TH]  25.4,4 0 top
TP15  NF  [TP-40TH]  4,84.5 0 top
TP16  NF  [TP-40TH]  156.31,43.73 0 top
TP17  NF  [TP-40TH]  156.31,29.77 0 top
U2  [IC_STM32H753ZIT6]  111.64,44.43 90 top
U4  [SOIC-16]  125.44,77.52 270 top
U10  [IC_MAX33054EASA+]  94.71,70.41 270 top
U11  [IC_MAX33054EASA+]  84.55,70.41 270 top
U12  [IS61WV204816BLL-10TLI]  147.01,61.64 270 top
U13  3V3  [TO220L1A]  37.9,7.5 270 top
U15  [IS61WV204816BLL-10TLI]  137.48,24.63 270 top
X1  [XTAL_NX3215SA]  105.89,30.02 180 top
X2  [XTAL_NX2016SA]  112.74,27.43 270 top

## Library data of the parts
C1-C32 C34-C49 C57 C58 C63 C64 = KSP-CAP
D1 D4 = KSP-TVS; TYPE: CDSOD323
D2 D3 D9-D11 = KSP-DIO; TYPE: BAT54S
FB1 FB2 = KSP-MAG; TYPE: BEAD
H1-H6 = KSP-MIS; TYPE: 3.2D & 6.35
J1 = KSP-CNR; TYPE: 2 ROW MICRO HDR
J3 J4 = KSP-CNR; TYPE: 2 ROW SKT-STRIP
J6 = KSP-CNR; TYPE: MICRO-USB
J7 J8 = KSP-CNR; TYPE: D-SUB
LED1-LED5 = KSP-OPT; TYPE: LED YEL
R1-R3 R10-R12 = KSP-RES; TYPE: 4 PACK ISOL
R4-R6 R8 R9 R13-R17 R19-R30 R35-R46 R63 R65 R78 R79 R81-R89 = KSP-RES
S1-S3 = KSP-SWT; TYPE: 1PST Mom
TP1-TP17 = KSP-CNR; TYPE: TEST POINT PTH
U2 = KSP-ICT; TYPE: STM32H753ZIT6
U4 = KSP-ICT; TYPE: 74LVC138
U10 U11 = KSP-ICT; TYPE: MAX33054
U12 U15 = KSP-ICT; TYPE: IS61WV204816
U13 = KSP-ICT; TYPE: LFnnABV
X1 = KSP-OSC; TYPE: 32.768KHz
X2 = KSP-OSC; TYPE: 25MHz

## Nets
3V3: C2.1 C5.1 C6.1 C7.1 C8.1 C9.1 C10.1 C11.1 C12.1 C13.1 C14.1 C15.1 C18.1 C19.1 C20.1 C21.1 C22.1 C23.1 C30.1 C31.1 C32.1 C34.1 C37.2 C38.2 C39.2 C48.2 C64.1 D4.C D9.2 D10.2 D11.2 FB2.2 J1.3 J4.17 J4.19 J4.29 J4.30 R4.2 R5.1 R8.2 R13.2 R14.1 R17.2 R21.1 R35.2 R36.2 R63.2 R79.2 R82.2 R83.2 R84.2 R85.2 TP14.P$1 U2.6 U2.17 U2.30 U2.39 U2.52 U2.62 U2.72 U2.84 U2.108 U2.121 U2.131 U2.144 U4.6 U4.16 U10.3 U10.5 U11.3 U11.5 U12.12 U12.36 U13.3 U15.12 U15.36
/CE0 [MRAM Bus]: TP5.P$1 U4.15 U12.7
/CE1 [MRAM Bus]: TP6.P$1 U4.14 U15.7
/E1 [MRAM Bus]: R63.1 TP3.P$1 U2.97 U4.5
/LB [MRAM Bus]: R46.1 TP10.P$1 U2.141 U12.42 U15.42
/OE [MRAM Bus]: R17.1 TP9.P$1 U2.118 U12.44 U15.44
/UB [MRAM Bus]: R45.1 TP7.P$1 U2.142 U12.43 U15.43
/USR_BTN1: J4.23 R20.2 U2.96
/USR_BTN2: J4.25 R37.2 U2.44
/USR_RST: D3.3 J4.21 R19.2
/WE [MRAM Bus]: R13.1 TP8.P$1 U2.119 U12.18 U15.18
A0 [MRAM Bus]: TP16.P$1 U2.10 U12.5 U15.5
A1 [MRAM Bus]: TP4.P$1 U2.11 U12.4 U15.4
A2 [MRAM Bus]: U2.12 U12.3 U15.3
A3 [MRAM Bus]: U2.13 U12.2 U15.2
A4 [MRAM Bus]: U2.14 U12.1 U15.1
A5 [MRAM Bus]: U2.15 U12.48 U15.48
A6 [MRAM Bus]: U2.50 U12.47 U15.47
A7 [MRAM Bus]: U2.53 U12.46 U15.46
A8 [MRAM Bus]: U2.54 U12.45 U15.45
A9 [MRAM Bus]: U2.55 U12.30 U15.30
A10 [MRAM Bus]: U2.56 U12.29 U15.29
A11 [MRAM Bus]: U2.57 U12.28 U15.28
A12 [MRAM Bus]: U2.87 U12.27 U15.27
A13 [MRAM Bus]: U2.88 U12.26 U15.26
A14 [MRAM Bus]: U2.89 U12.25 U15.25
A15 [MRAM Bus]: U2.90 U12.24 U15.24
A16 [MRAM Bus]: U2.80 U12.23 U15.23
A17 [MRAM Bus]: U2.81 U12.22 U15.22
A18 [MRAM Bus]: U2.82 U12.21 U15.21
A19 [MRAM Bus]: U2.2 U12.20 U15.20
A20 [MRAM Bus]: U2.3 U12.31 U15.31
A21 [MRAM Bus]: U2.4 U4.1
A22 [MRAM Bus]: U2.5 U4.2
A23 [MRAM Bus]: U2.1 U4.3
AV0: R10.5 U2.49
AV1: R10.6 U2.42
AV2: R10.7 U2.47
AV3: R10.8 U2.45
AV4: R3.5 U2.28
AV5: R3.6 U2.29
AV6: R3.7 U2.26
AV7: R3.8 U2.27
BOOT0: R6.2 U2.138
CAN1_HI: J4.39 J7.7 R27.1 U11.7
CAN1_LO: J4.41 J7.2 R26.1 U11.6
CAN2_HI: J3.47 J8.7 R29.1 U10.7
CAN2_LO: J3.49 J8.2 R30.1 U10.6
D0 [MRAM Bus]: TP17.P$1 U2.85 U12.8 U15.8
D1 [MRAM Bus]: U2.86 U12.9 U15.9
D2 [MRAM Bus]: U2.114 U12.10 U15.10
D3 [MRAM Bus]: U2.115 U12.11 U15.11
D4 [MRAM Bus]: U2.58 U12.14 U15.14
D5 [MRAM Bus]: U2.59 U12.15 U15.15
D6 [MRAM Bus]: U2.60 U12.16 U15.16
D7 [MRAM Bus]: U2.63 U12.17 U15.17
D8 [MRAM Bus]: U2.64 U12.32 U15.32
D9 [MRAM Bus]: U2.65 U12.33 U15.33
D10 [MRAM Bus]: U2.66 U12.34 U15.34
D11 [MRAM Bus]: U2.67 U12.35 U15.35
D12 [MRAM Bus]: U2.68 U12.38 U15.38
D13 [MRAM Bus]: U2.77 U12.39 U15.39
D14 [MRAM Bus]: U2.78 U12.40 U15.40
D15 [MRAM Bus]: U2.79 U12.41 U15.41
DGND: C1.2 C2.2 C3.2 C4.2 C5.2 C6.2 C7.2 C8.2 C9.2 C10.2 C11.2 C12.2 C13.2 C14.2 C15.2 C16.2 C17.2 C18.2 C19.2 C20.2 C21.2 C22.2 C23.2 C24.1 C25.2 C26.2 C27.2 C28.2 C29.2 C30.2 C31.2 C32.2 C34.2 C35.2 C36.2 C37.1 C38.1 C39.1 C40.2 C41.2 C42.2 C43.2 C44.1 C45.1 C46.1 C47.1 C48.1 C49.1 C57.2 C58.2 C63.2 C64.2 D1.A D4.A D9.1 D10.1 D11.1 H1.P$1 H2.P$1 H3.P$1 H4.P$1 H5.P$1 H6.P$1 J1.5 J1.7 J3.2 J3.4 J3.6 J3.8 J3.10 J3.12 J3.15 J3.18 J3.21 J3.23 J3.24 J3.35 J3.36 J3.48 J3.50 J3.52 J4.2 J4.4 J4.6 J4.8 J4.10 J4.12 J4.14 J4.16 J4.26 J4.27 J4.28 J4.36 J4.38 J4.40 J4.42 J4.46 J4.48 J4.50 J4.52 J6.5 J6.6 J6.7 J6.8 J6.9 J6.10 J6.11 J7.3 J7.6 J7.MH1 J7.MH2 J8.3 J8.6 J8.MH1 J8.MH2 LED1.C LED2.C LED3.C LED4.C LED5.C R6.1 R16.1 R25.1 R28.1 R40.1 R41.1 R44.1 R45.2 R46.2 R88.1 S1.3 S1.4 S2.3 S2.4 S3.3 S3.4 TP1.P$1 TP2.P$1 TP12.P$1 TP15.P$1 U2.16 U2.31 U2.38 U2.51 U2.61 U2.83 U2.94 U2.107 U2.120 U2.130 U4.4 U4.8 U10.2 U11.2 U12.13 U12.37 U13.2 U15.13 U15.37 X2.2 X2.4
FDCAN1_RX: U2.103 U11.4
FDCAN1_TX: R35.1 U2.104 U11.1
FDCAN2_RX: U2.73 U10.4
FDCAN2_TX: R36.1 U2.74 U10.1
GPIO0: J3.26 U2.135
GPIO1: J3.25 U2.129
GPIO2: J3.28 U2.22
GPIO3: J3.27 U2.20
GPIO4: J3.30 U2.19
GPIO5: J3.29 U2.18
GPIO6: J3.32 U2.100
GPIO7: J3.31 U2.99
GPIO8: J3.34 U2.75
GPIO9: J3.33 U2.76
GPIO10: J3.38 U2.127
GPIO11: J3.37 U2.122
GPIO12: J3.40 U2.117
GPIO13: J3.39 U2.116
GPIO14: J3.42 U2.113
GPIO15: J3.41 U2.102
GPIO16: J3.44 U2.101
GPIO17: J3.43 U2.98
GPIO18: J3.46 U2.48
GPIO19: J3.45 U2.41
GPIO20: J3.22 U2.124
GPIO21: J3.17 U2.123
GPIO22: J3.16 U2.126
GPIO23: J3.11 U2.125
GPIO24: J3.9 U2.140
GPIO25: J3.7 U2.139
GPIO26: J3.5 U2.132
GPIO27: J3.3 U2.70
GPIO28: J3.1 U2.69
GPIO29: J4.51 U2.137
GPIO30: J4.49 U2.136
JTDO-SWO: R65.2 U2.133
JTRST: R88.2 TP13.P$1 U2.134
L_CSN+1: C40.1 R2.5 R10.4
L_CSN+10: C41.1 R2.6 R10.3
L_CSN+11: C42.1 R2.7 R10.2
L_CSN+12: C43.1 R2.8 R10.1
L_CSN+13: C44.2 R1.5 R3.4
L_CSN+14: C45.2 R1.6 R3.3
L_CSN+15: C46.2 R1.7 R3.2
L_CSN+16: C47.2 R1.8 R3.1
LED1: J4.24 R22.1 U2.91
LED2: J4.22 R23.1 U2.92
LED3: J4.20 R24.1 U2.93
N$2: C26.1 R4.1 U2.95
N$6: FB1.2 R8.1
N$8: C25.1 C29.1 FB2.1 U2.33
N$10: C35.1 R9.2 X2.3
N$11: C4.1 U2.106
N$13: C3.1 U2.71
N$15: C58.1 R87.2
N$18: R15.2 U2.25
N$19: D2.1 D3.1 R14.2 R86.2
N$23: R19.1 S2.1 S2.2
N$24: R5.2 U2.143
N$25: C24.2 R26.2 R27.2
N$26: R25.2 U11.8
N$27: R28.2 U10.8
N$28: C49.2 R29.2 R30.2
N$29: J1.11 R16.2
N$30: R20.1 S1.1 S1.2
N$31: C1.1 R15.1 R86.1
N$32: LED4.A R21.2
N$33: LED1.A R22.2
N$34: LED2.A R23.2
N$35: LED3.A R24.2
N$36: R37.1 S3.1 S3.2
N$37: LED5.A R38.2
N$38: J6.3 R40.2 R42.1 R43.1
N$39: J6.2 R39.1 R41.2 R43.2
N$40: J6.4 R44.2
PPS: J3.51 U2.7
RCC_OSC32_IN: C16.1 U2.8 X1.2
RCC_OSC32_OUT: C17.1 U2.9 X1.1
RCC_OSC_IN: C36.1 U2.23 X2.1
RCC_OSC_OUT: R9.1 U2.24
T_JTCK/SWCLK: J1.6 R87.1 U2.109
T_JTDI: J1.10 R84.1 U2.110
T_JTDO/SWO: J1.8 R65.1 R85.1
T_JTMS/SWDIO: J1.4 R83.1 U2.105
T_NRST: D2.3 J1.12
T_USART3_RX: D10.3 J1.13 U2.112
T_USART3_TX: J1.14 R89.1
THM0: J4.1 R2.4 R11.5
THM1: J4.3 R2.3 R11.6
THM2: J4.5 R2.2 R11.7
THM3: J4.7 R2.1 R11.8
THM4: J4.9 R1.4 R12.5
THM5: J4.11 R1.3 R12.6
THM6: J4.13 R1.2 R12.7
THM7: J4.15 R1.1 R12.8
UART4_RX: D9.3 J4.47 U2.35
UART4_TX: J4.45 R81.1 R82.1
UART4_TXB: R81.2 U2.34
USART2_RX: D11.3 J4.37 U2.37
USART2_TX: J4.35 R78.1 R79.1
USART2_TXB: R78.2 U2.36
USART3_TX: R89.2 U2.111
VCC [MRAM Bus]: C57.1 C63.1 D1.C J6.1 R38.1 R39.2 R42.2 TP11.P$1 U13.1
VREF+ [Vref]: C27.1 C28.1 FB1.1 J4.18 R11.1 R11.2 R11.3 R11.4 R12.1 R12.2 R12.3 R12.4 U2.32